# EAGLE board swarm-agg1-ar (EAGLE 4.16)
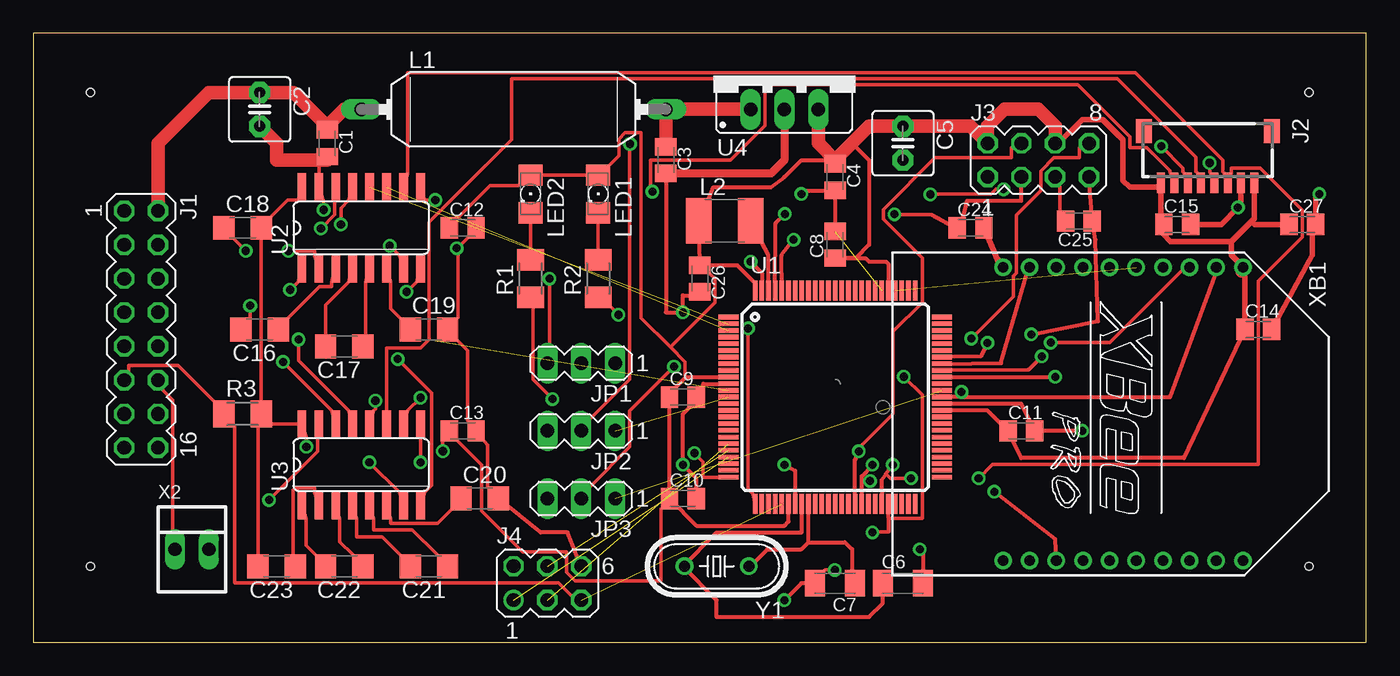
[diagram p0: board, top side]
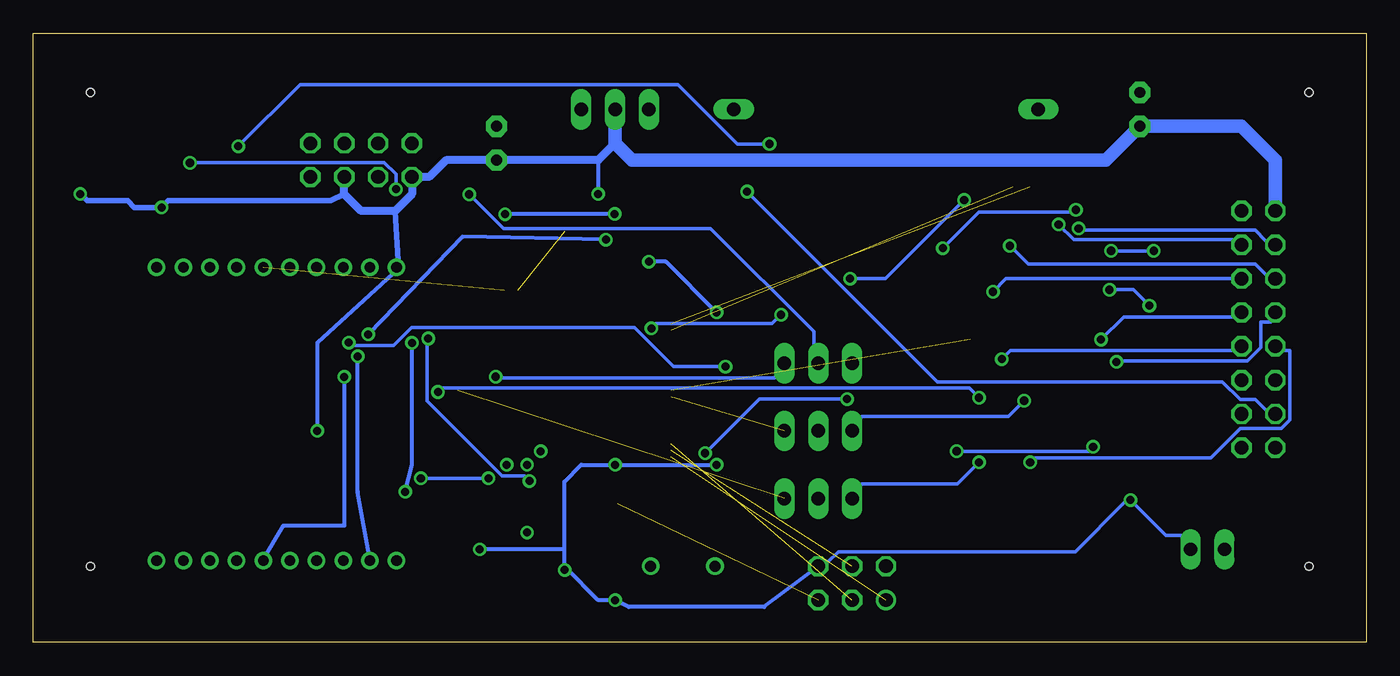
[diagram p1: board, bottom side, seen from below]

Size 100 x 45.71 mm. Coordinates in mm from the lower left corner, seen from the top.
Outline: 0,0 100,0 100,45.71 0,45.71 0,0
Copper layers (1*16): Top 0.035mm / dielectric 1.5mm / Bottom 0.035mm
Design rules "default": minimum track width 10mil, minimum drill 24mil, track to track 8mil, track to pad 8mil, pad to pad 8mil, via to via 8mil, smd to smd 8mil, copper to edge 40mil, drill to drill 8mil, minimum pad ring 10mil, minimum via ring 8mil, stop-mask expansion 4mil, vias tented up to drill 0mil, thermal gap 10mil
Holes 0.6 mm at 4.28,5.71 4.28,41.27 95.72,41.27 95.72,5.71

## Footprints (pad centres in the part's own frame; a part is rotated, then mirrored left to right if it is on the bottom)
C0805K = smd 1.3 x 1.6: 1 -1,0; 2 1,0
C2.5-5 = drill 0.813 pad 1.6 octagon: 1 -1.27,0; 2 1.27,0
C1206K = smd 1.5 x 2: 1 -1.5,0; 2 1.5,0
C1206 = smd 1.6 x 1.8: 1 -1.4,0; 2 1.4,0
MA08-2 = drill 1.016 octagon: 1 -8.89,-1.27; 2 -8.89,1.27; 3 -6.35,-1.27; 4 -6.35,1.27; 5 -3.81,-1.27; 6 -3.81,1.27; 7 -1.27,-1.27; 8 -1.27,1.27; 9 1.27,-1.27; 10 1.27,1.27; 11 3.81,-1.27; 12 3.81,1.27; 13 6.35,-1.27; 14 6.35,1.27; 15 8.89,-1.27; 16 8.89,1.27
SM08B-SRSS-TB = smd 0.6 x 1.55: 1 -3.5,2.975; 2 -2.5,2.975; 3 -1.5,2.975; 4 -0.5,2.975; 5 0.5,2.975; 6 1.5,2.975; 7 2.5,2.975; 8 3.5,2.975 | smd 1.2 x 1.8: FIT@1 -4.8,-0.9; FIT@2 4.8,-0.9
MA04-2 = drill 1.016 octagon: 1 -3.81,-1.27; 2 -3.81,1.27; 3 -1.27,-1.27; 4 -1.27,1.27; 5 1.27,-1.27; 6 1.27,1.27; 7 3.81,-1.27; 8 3.81,1.27
MA03-2 = drill 1.016 round: 1 -2.54,-1.27 | drill 1.016 octagon: 2 -2.54,1.27; 3 0,-1.27; 4 0,1.27; 5 2.54,-1.27; 6 2.54,1.27
MA03-1 = drill 1.016 long: 1 -2.54,0; 2 0,0; 3 2.54,0
SUKW2-22 = drill 1.016 long: 1 -11.43,0; 2 11.43,0
L1812 = smd 1.9 x 3.4: 1 -1.95,0; 2 1.95,0
1206 = smd 1.6 x 1.803: A -1.422,0; C 1.422,0
M1206 = smd 1.6 x 2: 1 -1.4,0; 2 1.4,0
TQFP100 = smd 1.5 x 0.35: 1 -8,6; 2 -8,5.5; 3 -8,5; 4 -8,4.5; 5 -8,4; 6 -8,3.5; 7 -8,3; 8 -8,2.5; 9 -8,2; 10 -8,1.5; 11 -8,1; 12 -8,0.5; 13 -8,0; 14 -8,-0.5; 15 -8,-1; 16 -8,-1.5; 17 -8,-2; 18 -8,-2.5; 19 -8,-3; 20 -8,-3.5; 21 -8,-4; 22 -8,-4.5; 23 -8,-5; 24 -8,-5.5; 25 -8,-6; 51 8,-6; 52 8,-5.5; 53 8,-5; 54 8,-4.5; 55 8,-4; 56 8,-3.5; 57 8,-3; 58 8,-2.5; 59 8,-2; 60 8,-1.5; 61 8,-1; 62 8,-0.5; 63 8,0; 64 8,0.5; 65 8,1; 66 8,1.5; 67 8,2; 68 8,2.5; 69 8,3; 70 8,3.5; 71 8,4; 72 8,4.5; 73 8,5; 74 8,5.5; 75 8,6 | smd 0.35 x 1.5: 26 -6,-8; 27 -5.5,-8; 28 -5,-8; 29 -4.5,-8; 30 -4,-8; 31 -3.5,-8; 32 -3,-8; 33 -2.5,-8; 34 -2,-8; 35 -1.5,-8; 36 -1,-8; 37 -0.5,-8; 38 0,-8; 39 0.5,-8; 40 1,-8; 41 1.5,-8; 42 2,-8; 43 2.5,-8; 44 3,-8; 45 3.5,-8; 46 4,-8; 47 4.5,-8; 48 5,-8; 49 5.5,-8; 50 6,-8; 76 6,8; 77 5.5,8; 78 5,8; 79 4.5,8; 80 4,8; 81 3.5,8; 82 3,8; 83 2.5,8; 84 2,8; 85 1.5,8; 86 1,8; 87 0.5,8; 88 0,8; 89 -0.5,8; 90 -1,8; 91 -1.5,8; 92 -2,8; 93 -2.5,8; 94 -3,8; 95 -3.5,8; 96 -4,8; 97 -4.5,8; 98 -5,8; 99 -5.5,8; 100 -6,8
SO16 = smd 0.66 x 2.032: 1 -4.445,-3.073; 2 -3.175,-3.073; 3 -1.905,-3.073; 4 -0.635,-3.073; 5 0.635,-3.073; 6 1.905,-3.073; 7 3.175,-3.073; 8 4.445,-3.073; 9 4.445,3.073; 10 3.175,3.073; 11 1.905,3.073; 12 0.635,3.073; 13 -0.635,3.073; 14 -1.905,3.073; 15 -3.175,3.073; 16 -4.445,3.073
78XXS = drill 1.016 long: GND 0,-2.54; IN -2.54,-2.54; OUT 2.54,-2.54
22-23-2021 = drill 1 long: 1 -1.27,0; 2 1.27,0
XBEE-PRO = drill 0.8 pad 1.27 round: 1 -11,9; 2 -11,7; 3 -11,5; 4 -11,3; 5 -11,1; 6 -11,-1; 7 -11,-3; 8 -11,-5; 9 -11,-7; 10 -11,-9; 11 11,-9; 12 11,-7; 13 11,-5; 14 11,-3; 15 11,-1; 16 11,1; 17 11,3; 18 11,5; 19 11,7; 20 11,9
HC49/S = drill 0.813 round: 1 -2.413,0; 2 2.413,0

## Placement (x,y rotation side)
C1  0.1  [C0805K]  22.06,37.46 270 top
C2  220uF  [C2.5-5]  16.98,40 270 top
C3  0.1  [C0805K]  47.46,36.19 270 top
C4  0.1  [C0805K]  60.16,34.92 270 top
C5  10uF  [C2.5-5]  65.24,37.46 270 top
C6  22pF  [C1206K]  65.24,4.44 0 top
C7  22pF  [C1206K]  60.16,4.44 180 top
C8  0.1  [C0805K]  60.16,29.84 90 top
C9  0.1  [C0805K]  48.73,18.41 0 top
C10  0.1  [C0805K]  48.73,10.79 0 top
C11  0.1  [C0805K]  74.13,15.87 0 top
C12  0.1  [C0805K]  32.22,31.11 0 top
C13  0.1  [C0805K]  32.22,15.87 0 top
C14  0.1  [C0805K]  91.91,23.49 0 top
C15  0.1  [C0805K]  85.81,31.36 0 top
C16  1uF  [C1206]  16.98,23.49 180 top
C17  1uF  [C1206]  23.33,22.22 180 top
C18  1uF  [C1206]  15.71,31.11 0 top
C19  1uF  [C1206]  29.68,23.49 0 top
C20  1uF  [C1206]  33.49,10.79 0 top
C21  1uF  [C1206]  29.68,5.71 180 top
C22  1uF  [C1206]  23.33,5.71 180 top
C23  1uF  [C1206]  18.25,5.71 180 top
C24  0.1  [C0805K]  70.32,31.11 0 top
C25  0.1  [C0805K]  78.45,31.62 180 top
C26  0.1  [C0805K]  50,27.3 270 top
C27  0.1  [C0805K]  95.21,31.36 0 top
J1  [MA08-2]  8.09,23.49 270 top
J2  SM08B-SRSS-TB  [SM08B-SRSS-TB]  88.1,37.46 180 top
J3  [MA04-2]  75.4,36.19 0 top
J4  [MA03-2]  38.57,4.44 0 top
JP1  [MA03-1]  41.11,20.95 180 top
JP2  [MA03-1]  41.11,15.87 180 top
JP3  [MA03-1]  41.11,10.79 180 top
L1  100uH  [SUKW2-22]  36.03,40 0 top
L2  10uH  [L1812]  51.88,31.64 0 top
LED1  [1206]  42.38,33.65 270 top
LED2  [1206]  37.3,33.65 270 top
R1  330  [M1206]  37.3,27.3 90 top
R2  330  [M1206]  42.38,27.3 90 top
R3  1k  [M1206]  15.71,17.14 0 top
U1  MEGA640  [TQFP100]  60.16,18.41 0 top
U2  MAX3232CSE  [SO16]  24.6,31.11 0 top
U3  MAX3232CSE  [SO16]  24.6,13.33 0 top
U4  7805  [78XXS]  56.35,42.54 0 top
X2  22-23-2021  [22-23-2021]  11.9,6.98 0 top
XB1  XBEE-PRO  [XBEE-PRO]  81.75,17.14 270 top
Y1  14.7456 MHz  [HC49/S]  51.27,5.71 180 top

## Library data of the parts
C1 C3 C4 C6-C27 L2 R1-R3 = rcl
C2 C5 = capacitor-wima
J1 J3 J4 JP1-JP3 = con-lstb
J2 = con-jst2
L1 = inductors
LED1 LED2 = led
U1 = atmel-tad
U2 U3 = maxim
U4 = v-reg
X2 = con-molex
XB1 = maxstream
Y1 = crystal

## Nets
GND: C1.2 C2.2 C3.2 C4.2 C5.2 C6.2 C7.2 C8.2 C9.2 C10.2 C11.2 C12.2 C13.2 C14.2 C15.2 C19.2 C20.2 C24.2 C25.2 C26.2 C27.2 J1.1 J2.2 J3.1 J3.5 J4.6 U1.11 U1.32 U1.62 U1.81 U1.99 U2.15 U3.15 U4.GND X2.2 XB1.10
N$1: U1.3 U2.11
N$3: C16.2 U2.1
N$4: J1.3 U2.14
N$5: J1.4 U2.13
N$6: J1.5 U2.7
N$7: J1.6 U2.8
N$8: U1.2 U2.12
N$9: JP1.3 U2.9
N$10: J2.3 U1.45 U2.10
N$11: JP1.1 U1.46
N$12: J2.4 JP1.2
N$13: J1.7 U3.14
N$14: J1.8 U3.13
N$15: J2.5 U1.12 U3.11
N$16: C3.1 L1.2 U4.IN
N$17: C1.1 C2.1 J1.2 L1.1
N$18: C24.1 J3.3 U1.97
N$19: C25.1 J3.7 U1.96
N$20: J1.9 U3.7
N$21: J1.10 U3.8
N$22: J2.6 JP2.2
N$23: JP2.3 U3.12
N$24: JP3.3 U3.9
N$25: U1.63 U3.10 XB1.2
N$26: JP3.1 U1.64
N$27: JP3.2 XB1.3
N$28: JP2.1 U1.13
N$29: C6.1 U1.33 Y1.2
N$30: J4.1 U1.22
N$31: J4.3 U1.20
N$32: J1.12 X2.1
N$33: J1.11 J4.5 R3.1 U1.30
N$34: J4.4 U1.21
N$35: C7.1 U1.34 Y1.1
N$36: J3.4 U1.41
N$37: J3.8 U1.42
N$38: C16.1 U2.3
N$39: C17.2 U2.4
N$40: C17.1 U2.5
N$41: C19.1 U2.6
N$42: C18.1 U2.2
N$43: C23.1 U3.2
N$44: C20.1 U3.6
N$45: C21.1 U3.5
N$46: C21.2 U3.4
N$47: C22.1 U3.3
N$48: C22.2 U3.1
N$49: L2.2 U1.98
N$50: LED2.C R1.2
N$51: R1.1 U1.25
N$52: LED1.C R2.2
N$53: R2.1 U1.26
N$54: U1.79 XB1.5
N$55: U1.69 XB1.13
N$56: U1.68 XB1.9
N$57: U1.67 XB1.12
N$58: U1.66 XB1.16
N$59: J1.13 J2.7
VCC: C4.1 C5.1 C8.1 C9.1 C10.1 C11.1 C12.1 C13.1 C14.1 C15.1 C18.2 C23.2 C26.1 C27.1 J2.1 J2.8 J3.2 J3.6 L2.1 LED1.A LED2.A R3.2 U1.10 U1.31 U1.61 U1.80 U1.100 U2.16 U3.16 U4.OUT XB1.1

## Tracks (layer width: path | path; a pad name or v marks a point on that pad's centre or on a via)
GND  (via drill 0.6, 0.61)  (1 unrouted)
  Top 0.254: C25.2 77,32.41 77,34.18 J3.5 | 21.42,36.19 U2.15 21.73,33.19 21.78,33.14 v21.78,32.46 | 72.33,28.71 72.48,28.77 XB1.10 | v17.69,10.69 21.32,14.32 21.32,15.41 U3.15 | 31.86,29.61 32.58,30.32 C12.2 | 31.86,29.61 31.86,24.38 C19.2 31.86,22.6 32.58,21.89 32.58,16.66 C13.2 33.85,15.08 34.1,14.83 34.1,11.68 C20.2 | v60.13,5.43 59.4,5.43 C7.2 | 31.86,29.61 v31.76,29.59
  Top 0.305: U1.99 54.66,27.72 v53.81,28.57 | C26.2 50,26.03 48.73,26.03 v48.73,24.76 47.46,24.76 C3.2 | C8.2 C4.2 57.89,33.92 v57.62,33.65 | C7.2 57.62,4.44 56.35,3.17 | C6.2 66.74,6.75 v66.51,6.98 | U1.32 57.16,12.87 v56.35,13.33 | C10.2 49.73,12.33 v48.73,13.33 48.73,17.14 50,18.41 | U1.11 50.27,19.41 50,18.41 | 50,18.41 C9.2 | U1.62 74.13,17.9 75.15,15.87 C11.2 v78.7,15.87 | C20.2 38.06,8.25 40.09,8.25 J4.6
  Top 0.406: J2.2 90.6,32.85 v90.39,32.63 89.12,31.36 C15.2 | v96.48,33.65 96.21,33.38 C27.2 95.97,31.11 95.97,29.08 C14.2 | 72.61,28.06 72.33,28.71 C24.2
  Top 0.61: U4.GND 56.35,36.19 55.35,35.19 C3.2
  Top 1.016: C2.2 18.25,37.46 18.25,36.19 21.42,36.19 22.06,36.19 C1.2
  Bottom 0.254: X2.2 13.91,8.05 15.05,8.05 v17.69,10.69 18.17,10.46 21.83,6.8 39.61,6.8 40.37,6.04 J4.6 | 60.01,5.56 v60.13,5.43 | v21.78,32.46 21.96,32.28 29.07,32.28 v31.76,29.59
  Bottom 0.305: v53.81,28.57 52.54,28.57 v48.73,24.76 | 57.62,36.19 v57.62,33.65 | 60.16,6.98 60.16,5.71 60.01,5.56 57.62,3.17 56.35,3.17 55.33,2.66 45.17,2.66 J4.6 | 60.16,6.98 60.16,12.06 58.89,13.33 v56.35,13.33 v48.73,13.33 | 60.16,6.98 v66.51,6.98 | v78.7,15.87 78.7,22.47 72.61,28.06
  Bottom 0.406: v96.48,33.65 95.97,33.14 92.93,33.14 92.42,32.63 v90.39,32.63 89.88,33.14 77.69,33.14 76.67,33.65 | XB1.10 72.61,28.06 72.86,32.38
  Bottom 0.61: 56.35,37.46 57.62,36.19 C5.2 69.05,36.19 70.32,34.92 J3.1 71.59,33.65 72.86,32.38 75.4,32.38 76.67,33.65 J3.5
  Bottom 1.016: J1.1 6.82,36.19 9.36,38.73 C2.2 19.52,36.19 55.08,36.19 56.35,37.46 U4.GND
N$1  (1 unrouted)
N$2  (via drill 0.6)
  other vias: 48.73,24.76
N$3  (via drill 0.61)
  Top 0.254: v16.27,25.27 16.27,24.38 C16.2 | v19.27,26.46 19.85,27.05 U2.1
  Bottom 0.254: v16.27,25.27 17.46,26.46 v19.27,26.46
N$4  (via drill 0.61)
  Top 0.254: v21.58,31.06 22.62,32.1 22.62,33.19 U2.14
  Bottom 0.254: v21.58,31.06 21.45,30.93 8.32,30.93 7.56,30.17 J1.3
N$5  (via drill 0.61)
  Top 0.254: v23.08,31.36 23.08,32.61 23.66,33.19 U2.13
  Bottom 0.254: v23.08,31.36 21.93,30.22 10.05,30.22 J1.4
N$6  (via drill 0.61)
  Top 0.254: v26.73,29.76 27.47,29.03 U2.7
  Bottom 0.254: v26.73,29.76 25.36,28.39 8.32,28.39 7.56,27.63 J1.5
N$7  (via drill 0.61)
  Top 0.254: v28,26.31 28.74,27.05 U2.8
  Bottom 0.254: v28,26.31 27.01,27.3 J1.6
N$8  (1 unrouted)
N$9  (via drill 0.61)
  Top 0.254: v30.16,33.19 29.35,33.19 U2.9 | v38.72,27.3 38.72,22.45 JP1.3
  Bottom 0.254: v30.16,33.19 36.05,27.3 v38.72,27.3
N$10  (via drill 0.61)
  Top 0.254: U2.10 28.08,35.17 28.08,42.77 82.66,42.77 89.24,36.19 89.24,35.33 89.32,35.25 J2.3 89.88,35.25 89.88,35.61 92.06,35.61 95.21,32.46 95.21,30.42 91.91,27.12 91.91,13.36 71.97,13.36 v70.93,12.31 | v65.85,12.31 64.3,12.31 64.07,12.54 63.96,12.62
  Top 0.305: U1.45 63.64,12.19 63.96,12.62 64.48,13.33
  Bottom 0.254: v70.93,12.31 v65.85,12.31
N$11  (via drill 0.61)
  Top 0.254: v65.32,19.93 66.69,18.56 66.69,9.32 64.3,9.32 64.17,9.32
  Top 0.305: U1.46 64.17,9.32 64.17,8.3 62.95,8.25
  Bottom 0.254: v65.32,19.93 65.24,19.86 44.39,19.86 JP1.1
N$12  (via drill 0.61)
  Top 0.254: v88.25,35.99 88.25,35.3 88.3,35.25 J2.4 | v72.78,34.01 72.22,34.01 71.84,33.62 v67.3,33.62
  Bottom 0.254: v88.25,35.99 88.23,36.01 73.67,36.01 72.78,35.12 v72.78,34.01 | v67.3,33.62 64.73,31.06 49.19,31.06 41.44,23.31 41.44,22.45 JP1.2
N$13  (via drill 0.61)
  Top 0.254: v18.73,21.05 22.39,17.39 U3.14
  Bottom 0.254: v18.73,21.05 18.66,21.13 8.9,21.13 7.91,22.12 7.91,24.02 7.15,24.02 J1.7
N$14  (via drill 0.61)
  Top 0.254: v19.9,22.73 19.9,21.15 23.66,17.39 U3.13
  Bottom 0.254: v19.9,22.73 18.2,24.43 10.1,24.43 J1.8
N$15  (1 unrouted)
  Top 0.254: J2.5 87.31,35.25 87.24,35.33 87.24,36.42 81.34,42.31 35.88,42.31 35.88,37.71 29.7,31.54 29.7,22.73 29.07,22.09 26.5,22.09 U3.11
N$16
  Top 0.254: C3.1 47.46,37.46
  Top 1.016: U4.IN L1.2 47.46,37.46
N$17
  Top 1.016: J1.2 9.36,37.46 13.17,41.27 C2.1 19.52,41.27 22.06,38.73 | 22.06,38.73 C1.1 | 22.06,38.73 23.33,40 L1.1
N$18  (via drill 0.6)
  Top 0.305: J3.3 74.13,33.14 70.07,33.14 69.56,31.11 C24.1 69.3,31.06 67.4,32.1 v64.61,32.13 | U1.97 55.69,31.47 v56.38,32.15
  Bottom 0.305: v56.38,32.15 v64.61,32.13
N$19  (via drill 0.6)
  Top 0.305: U1.96 56.15,29.05 v57.04,30.22 | J3.7 79.46,31.64 C25.1 79.69,30.2 79.87,24.1 v74.87,23.11
  Bottom 0.305: v74.87,23.11 67.78,30.45 57.04,30.25 v57.04,30.22
N$20  (via drill 0.61)
  Top 0.254: v25.21,13.51 27.47,11.25 U3.7
  Bottom 0.254: v25.21,13.51 24.88,13.84 11.67,13.84 9.46,16.05 6.36,16.05 5.73,16.68 5.73,21.89 6.08,21.89 J1.9
N$21  (via drill 0.61)
  Top 0.254: v27.34,21.25 29.88,18.71 29.88,11.78 29.35,11.25 U3.8
  Bottom 0.254: v27.34,21.25 26.71,21.89 10.1,21.89 J1.10
N$22  (via drill 0.61)
  Top 0.254: v84.62,37.23 86.25,35.61 86.25,35.33 86.32,35.25 J2.6 | v44.77,37.41 44.74,37.38 44.74,19.73 41.85,16.83 JP2.2
  Bottom 0.254: v84.62,37.23 80,41.85 51.63,41.85 47.18,37.41 v44.77,37.41
N$23  (via drill 0.61)
  Top 0.254: v25.67,18.13 25.67,17.52 25.54,17.39 U3.12
  Bottom 0.254: v25.67,18.13 26.83,16.96 37.83,16.96 JP2.3
N$24  (via drill 0.61)
  Top 0.254: v29.04,13.51 U3.9
  Bottom 0.254: v29.04,13.51 30.67,11.88 37.83,11.88 JP3.3
N$25  (via drill 0.61)
  Top 0.254: v29.04,18.36 28.08,17.39 U3.10 | v69.63,18.79 69.63,18.41
  Top 0.305: U1.63 69.63,18.41 85.31,18.41 88.86,28.06 XB1.2
  Bottom 0.254: v29.04,18.36 29.78,19.1 69.33,19.1 v69.63,18.79
N$26  (1 unrouted)
N$27  (via drill 0.61)
  Top 0.254: v76.34,22.5 80.76,22.5 86.12,27.86 XB1.3 | v48.07,20.7 44.74,17.37 44.74,14.65 41.85,11.76 JP3.2
  Bottom 0.254: v76.34,22.5 76.14,22.3 75.25,22.3 75.22,22.27 72.99,22.27 71.61,23.64 54.9,23.64 51.96,20.7 v48.07,20.7
N$28  (1 unrouted)
N$29
  Top 0.305: U1.33 57.66,8.29 57.62,8.25 51.27,8.25 48.73,5.71 | C6.1 63.74,2.94 62.7,1.9 51.27,1.9 51.27,3.17 48.73,5.71 | 48.73,5.71 Y1.2
N$30  (1 unrouted)
N$31  (1 unrouted)
N$32
  Top 0.254: X2.1 10.45,8.48 10.45,18.18 9.69,18.94 J1.12
N$33  (1 unrouted)
  Top 0.254: J1.11 7.15,20.42 7.15,20.77 10.88,20.77 13.53,18.13 R3.1 15.1,16.15 15.1,4.46 39.41,4.46 40.37,3.5 J4.5
N$34  (1 unrouted)
N$35
  Top 0.305: 58.16,7.52 U1.34 | 58.16,7.52 57.62,6.98 55.08,6.98 53.81,5.71 Y1.1 | 58.16,7.52 60.89,7.52 61.43,6.98 61.43,4.44 C7.1
N$36  (via drill 0.6)
  Top 0.254: v61.94,14.35 62.17,14.83 64.48,17.14 64.48,23.31 66.69,25.52 66.69,28.85 63.77,31.77 63.77,32.48 67.65,36.37 73.39,36.37 73.39,37.13 J3.4
  Top 0.305: U1.41 61.66,13.66 v61.94,14.35
N$37  (via drill 0.61)
  Top 0.254: v62.78,12.11 62.29,12.11 62.17,12.12 | v70.37,22.8 73.52,25.95 73.52,27.5 73.75,27.73 73.75,32.08 75.58,33.9 75.58,35.38 76.57,36.37 78.47,36.37 78.47,37.13 J3.8
  Top 0.305: U1.42 62.17,12.12 62.17,12.47 62.98,13.33
  Bottom 0.254: v62.78,12.11 63.16,12.49 64.83,12.49 70.47,18.13 70.47,22.8 v70.37,22.8
N$38
  Top 0.254: C16.1 19.16,24.38 21.48,26.69 22.39,26.69 22.39,27.05 U2.3
N$39
  Top 0.254: C17.2 21.93,23.11 21.93,25.32 23.66,27.05 U2.4
N$40
  Top 0.254: C17.1 24.93,23.11 24.93,27.05 U2.5
N$41
  Top 0.254: C19.1 27.5,24.38 26.81,25.06 26.81,27.05 U2.6
N$42  (via drill 0.61)
  Top 0.254: v15.94,29.38 15.1,30.22 C18.1 | v19.14,29.38 21.12,29.38 21.12,29.03 U2.2
  Bottom 0.254: v15.94,29.38 v19.14,29.38
N$43
  Top 0.254: C23.1 19.49,6.6 19.49,11.43 19.67,11.6 21.12,11.6 21.12,11.25 U3.2
N$44
  Top 0.254: C20.1 31.31,9.9 30.31,8.91 26.81,8.91 26.81,9.27 U3.6
N$45
  Top 0.254: C21.1 30.29,6.6 28.43,8.45 25.54,8.45 25.54,9.27 U3.5
N$46
  Top 0.254: C21.2 27.5,6.6 26.17,7.92 24.27,7.92 24.27,9.27 U3.4
N$47
  Top 0.254: C22.1 23.94,6.6 23,7.54 23,9.27 U3.3
N$48
  Top 0.254: C22.2 21.15,6.6 20.46,7.29 20.46,9.27 U3.1
N$49
  Top 0.305: U1.98 55.16,29.05 53.81,31.57 L2.2
N$50
  Top 0.254: R1.2 LED2.C
N$51  (via drill 0.61)
  Top 0.254: v49.59,14.19 50.23,13.56 50.23,12.39 51.42,12.39 U1.25 | v38.95,18.26 37.48,19.73 37.48,25.12 R1.1
  Bottom 0.254: v49.59,14.19 45.53,18.26 v38.95,18.26
N$52
  Top 0.254: R2.2 LED1.C
N$53  (via drill 0.61)
  Top 0.254: v53.63,23.57 53.63,11.5 53.99,11.15 U1.26 | v43.9,24.58 43.37,25.12 R2.1
  Bottom 0.254: v53.63,23.57 53.28,23.92 44.56,23.92 v43.9,24.58
N$54  (1 unrouted)
N$55  (via drill 0.6)
  Top 0.305: U1.69 71.08,21.46 v71.59,22.47 | XB1.13 76.67,7.74 v72.1,11.3
  Bottom 0.305: v72.1,11.3 71.59,13.33 v71.59,22.47
N$56
  Top 0.305: U1.68 72.61,20.95 74.64,28.06 XB1.9
N$57  (via drill 0.6)
  Top 0.305: U1.67 74.64,20.44 v75.65,21.46
  Bottom 0.305: XB1.12 75.65,11.3 v75.65,21.46
N$58  (via drill 0.6)
  Top 0.305: U1.66 v76.67,19.93
  Bottom 0.305: v76.67,19.93 76.67,8.76 81.24,8.76 82.77,6.22 XB1.16
N$59  (via drill 0.61)
  Top 0.254: v46.44,33.83 46.32,33.96 46.32,36.19 52.31,36.19 54.9,38.78 54.9,41.85 78.37,41.85 82.28,37.94 82.28,37.13 83.53,37.13 85.25,35.4 85.25,35.3 85.31,35.25 J2.7
  Bottom 0.254: v46.44,33.83 32.17,19.55 10.78,19.55 9.46,18.23 8.32,18.23 7.56,17.47 J1.13
N$60  (via drill 0.6)
  other vias: 57.62,33.65
N$61  (via drill 0.6)
  other vias: 56.35,3.17
N$62  (via drill 0.6)
  other vias: 66.51,6.98
N$63  (via drill 0.6)
  other vias: 56.35,13.33
N$64  (via drill 0.6)
  other vias: 48.73,13.33
N$65  (via drill 0.6)
  other vias: 62.95,13.33
N$66  (via drill 0.6)
  other vias: 64.48,13.33
N$67  (via drill 0.6)
  other vias: 62.95,8.25
VCC  (via drill 0.61)
  Top 0.254: U2.16 19.85,33.19 19.09,33.19 17.89,32 C18.2 17.11,30.22 17.11,18.13 R3.2 | C23.2 16.85,6.6 16.85,16.15 R3.2 | R3.2 17.89,16.4 U3.16 20.46,15.41 20.48,15.39 v20.48,14.68 | C12.1 31.86,31.9 34.25,34.29 36.41,34.29 LED2.A 38.19,35.07 41.49,35.07 LED1.A 43.27,35.86 43.93,36.52 43.93,37.77 44.41,38.25 45.61,38.25 45.61,24.35 47.8,22.16 | C10.1 47.1,10 47.1,4.62 40.65,4.62 40.02,5.25 40.02,6.8 36.69,6.8 33.64,9.85 33.64,13.31 31.86,15.08 C13.1 30.72,15.08 v30.72,14.35 | 47.8,22.16 48.91,21.05 48.91,20.06 48.96,19.91 | 47.8,22.16 51.14,25.5 51.14,27.3 50.79,27.66 C26.1
  Top 0.305: U1.100 54.16,26.95 52.81,28.3 C26.1 50,28.32 L2.1 50,31.62 51.02,34.16 55.33,34.16 56.35,34.92 57.62,36.19 60.16,36.19 | 61.43,37.46 62.7,36.19 62.7,29.84 61.7,28.84 C8.1 62.43,28.84 62.7,28.57 63.97,28.57 64.16,28.38 U1.80 | U1.10 48.96,19.91 47.46,18.41 47.71,18.41 | U1.31 56.66,9.07 56.35,8.76 49.75,8.76 47.71,10.79 C10.1 47.73,18.39 47.71,18.41 | 47.71,18.41 C9.1 | U1.61 71.59,17.39 73.11,15.87 | C14.1 86.32,13.84 74.13,13.84 73.11,15.87 | 73.11,15.87 C11.1
  Top 0.406: J3.6 76.92,37.46 78.7,39.24 80.23,39.24 81.75,37.71 81.75,34.67 82.26,34.16 84.29,34.16 84.62,34.48 J2.8 84.6,31.82 84.81,31.6 C15.1 84.81,30.59 85.31,30.09 89.88,30.09 | 90.82,28.14 90.89,28.06 | 90.82,28.14 XB1.1 arc327 90.89,28.06 | 89.88,30.09 89.88,29.08 90.82,28.14 | J2.1 91.6,31.82 91.4,31.62 | 89.88,30.09 91.4,31.62 | C27.1 91.66,31.36 91.4,31.62 | 90.89,28.06 C14.1
  Top 1.016: U4.OUT 58.89,37.46 60.16,36.19 | 60.16,36.19 C4.1 | 60.16,36.19 61.43,37.46 62.7,38.73 C5.1 70.32,38.73 J3.2 71.59,38.73 72.86,40 75.4,40 76.67,38.73 J3.6
  Bottom 0.254: v20.48,14.68 20.81,14.35 v30.72,14.35